# Allegro board ti_foc_motor_8301.brd
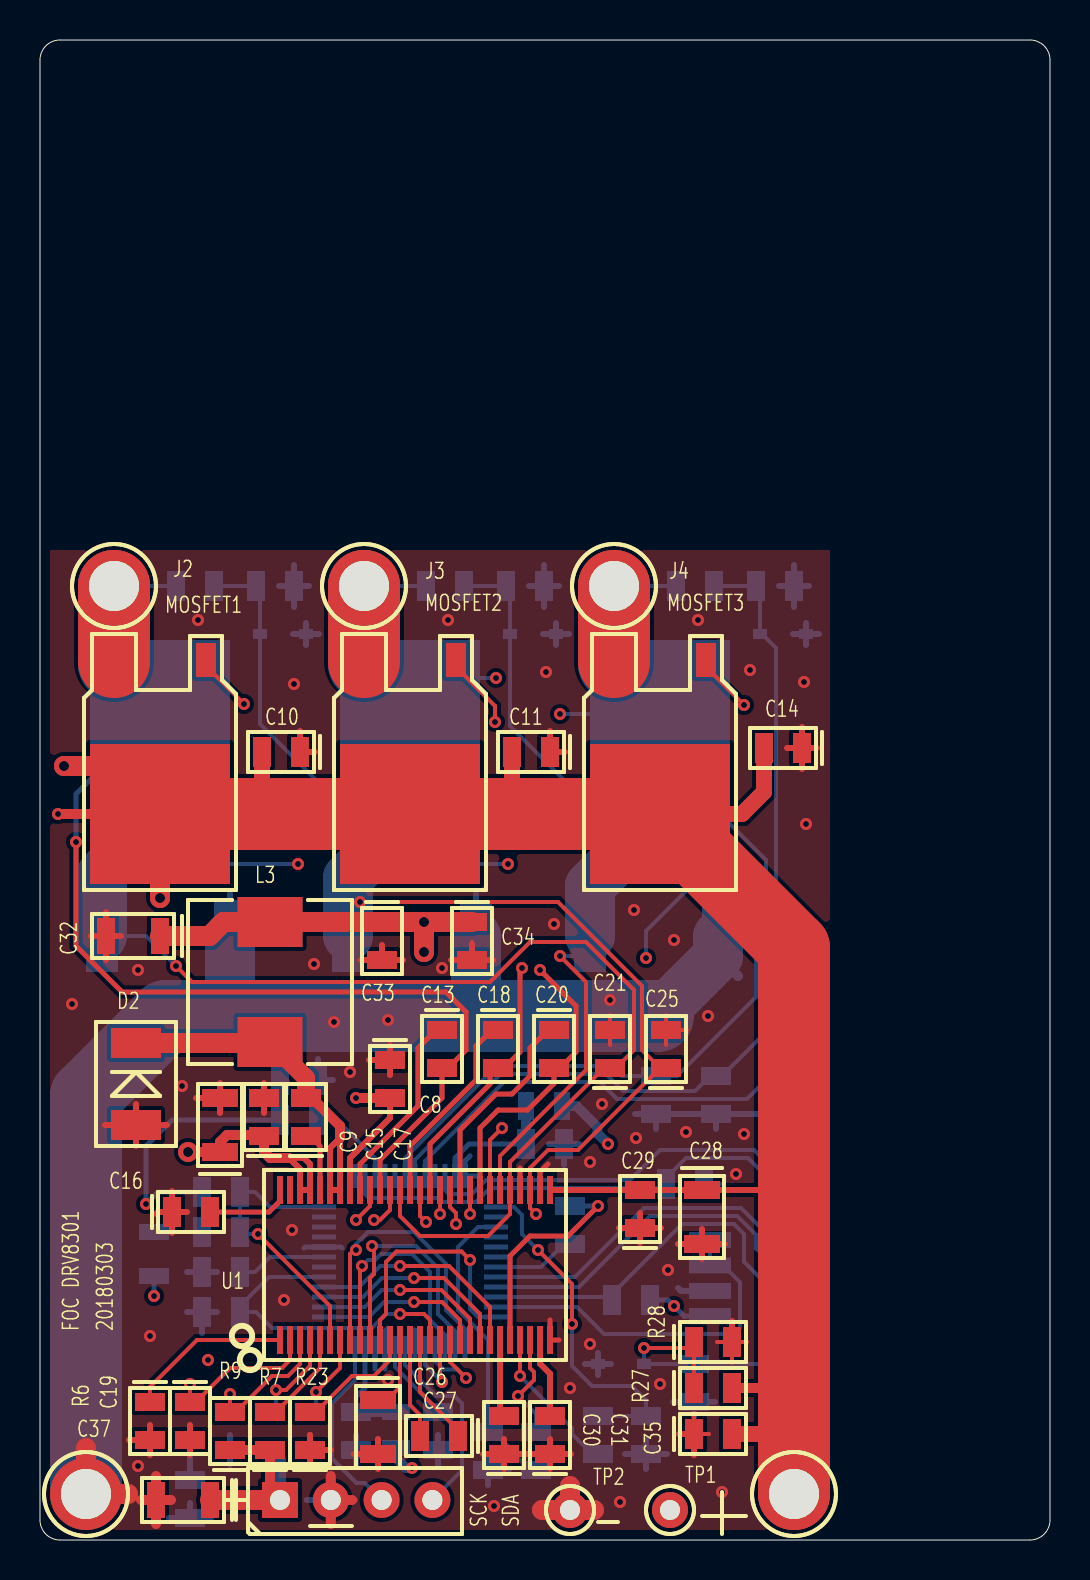
[diagram p0: board, top side]
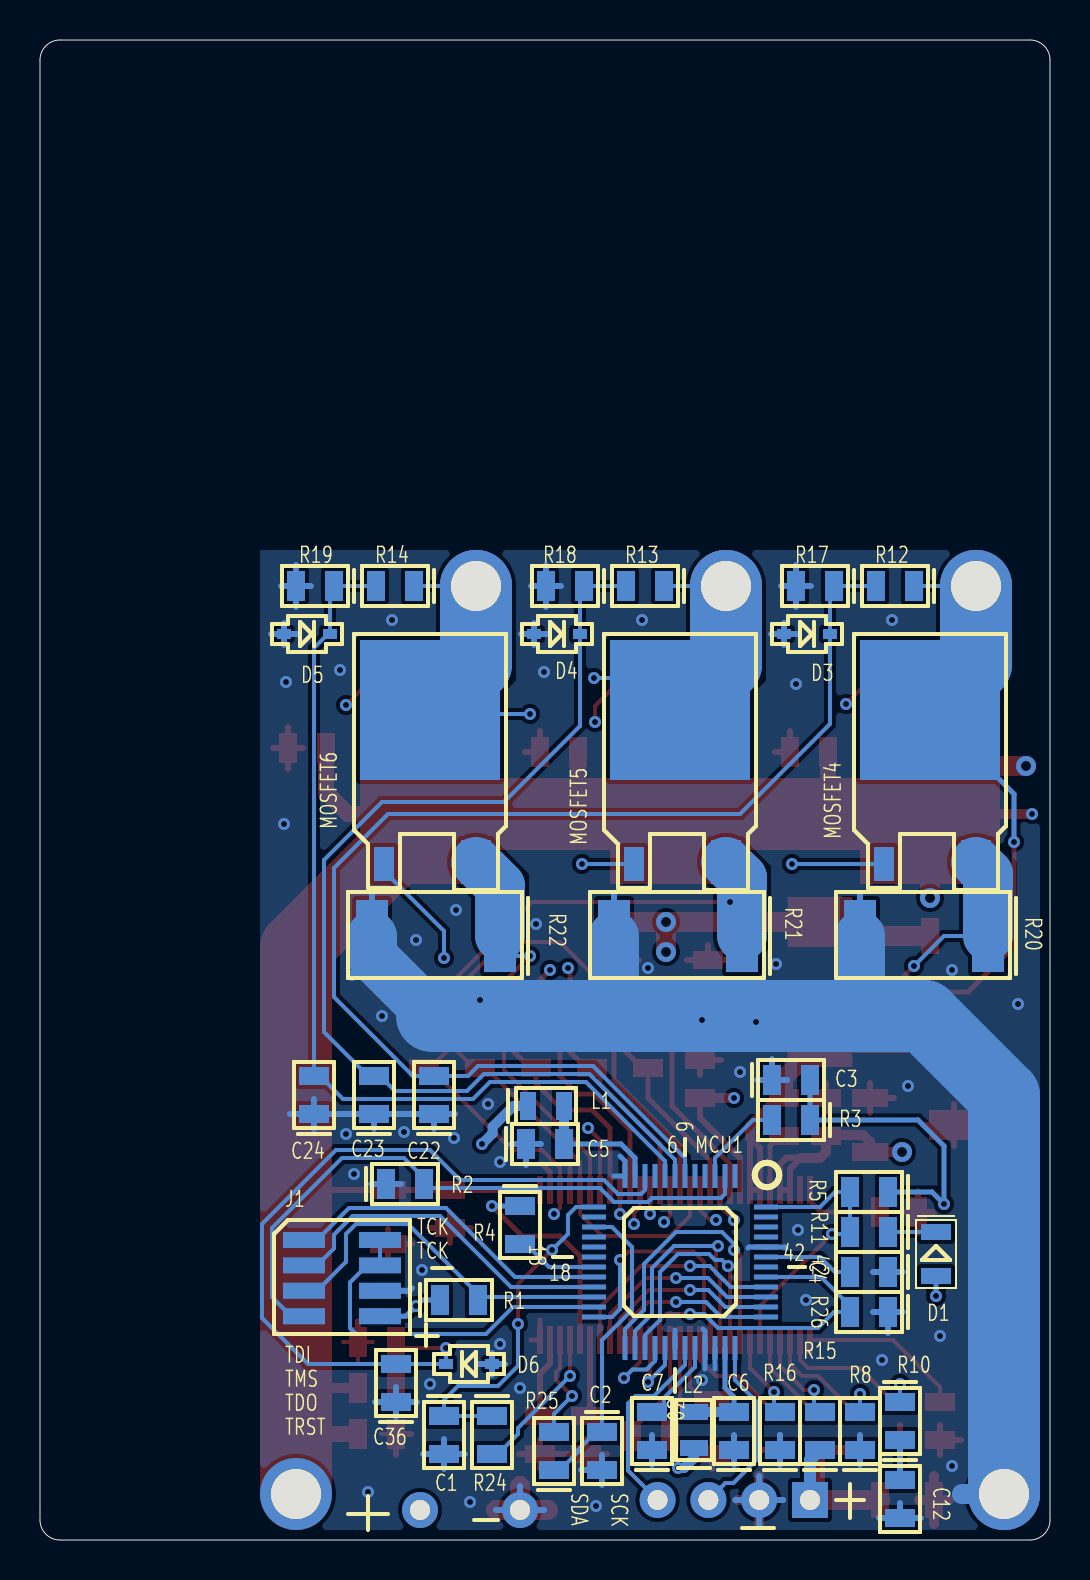
[diagram p1: board, bottom side, seen from below]

Outline 50.5 x 75 mm; copper layers: TOP, POWER, GND, BOTTOM. Coordinates in mm from the lower left corner of the outline.
Outline path: 0,74 0,1 arc(0.29,0.29) 1,0 49.5,0 arc(50.21,0.29) 50.5,1 50.5,74 arc(50.21,74.71) 49.5,75 1,75 arc(0.29,74.71) 0,74

## Design rules (mm)
constraint set DEFAULT: 

## Placement (name value [footprint] x y rotation side)
C1  2.2nF  [SMD_C_0805]  30.3 6.2 180 bottom
C2  2.2nF  [SMD_C_0805]  22.4 5.4 180 bottom
C3  2.2uF  [SMD_C_0805]  13.9 23 90 bottom
C4  2.2uF  [SMD_C_0805]  8.1 13.4 270 bottom
C5  2.2uF  [SMD_C_0805]  26.2 19.8 90 bottom
C6  2.2uF  [SMD_C_0805]  15.8 4.5 0 bottom
C7  2.2uF  [SMD_C_0805]  19.9 4.5 0 bottom
C8  0.1uF  [SMD_C_0805]  17.5 24 0 top
C9  2.2uF  [SMD_C_1206]  9 19.4 180 top
C10  2.2uF  [SMD_C_0805]  13 39.4 270 top
C11  2.2uF  [SMD_C_0805]  25.5 39.4 270 top
C12  6.8nF  [SMD_C_0805]  7.5 3 180 bottom
C13  0.1uF  [SMD_C_0805]  20.1 25.5 0 top
C14  2.2uF  [SMD_C_0805]  38.1 39.6 270 top
C15  0.1uF  [SMD_C_0805]  11.2 20.2 180 top
C16  15nF  [SMD_C_0805]  6.6 16.4 90 top
C17  0.1uF  [SMD_C_0805]  13.3 20.2 180 top
C18  0.1uF  [SMD_C_0805]  22.9 25.5 0 top
C19  120pF  [SMD_C_0805]  7.5 6.9 0 top
C20  0.1uF  [SMD_C_0805]  25.7 25.5 0 top
C21  1nF  [SMD_C_0805]  28.5 23.6 180 top
C22  0.1uF  [SMD_C_0805]  30.8 21.3 0 bottom
C23  0.1uF  [SMD_C_0805]  33.8 21.3 0 bottom
C24  0.1uF  [SMD_C_0805]  36.8 21.3 0 bottom
C25  1nF  [SMD_C_0805]  31.3 23.6 180 top
C26  2.2uF  [SMD_C_1206]  16.9 7 0 top
C27  22nF  [SMD_C_0805]  20.9 5.2 270 top
C28  2.2uF  [SMD_C_1206]  33.1 17.5 0 top
C29  0.1uF  [SMD_C_0805]  30 15.6 180 top
C30  1uF  [SMD_C_0805]  23.2 4.3 180 top
C31  1uF  [SMD_C_0805]  25.5 4.3 180 top
C32  47uF  [SMD_C_1206]  6 30.2 270 top
C33  1uF  [SMD_C_0805]  17.1 30.9 0 top
C34  0.1uF  [SMD_C_0805]  21.6 30.9 0 top
C35  0.1uF  [SMD_C_0805]  32.7 5.3 90 top
C36  0.1uF  [SMD_C_0805]  32.7 6.9 0 bottom
C37  47uF  [SMD_C_1206]  8.5 2 270 top
D1  RED  [SMD_D_0805]  5.7 15.3 180 bottom
D2  CDBB2100-G/100V  [DO-214AA]  4.8 22.8 90 top
D3  3.3V  [SOD323]  11 45.3 270 bottom
D4  3.3V  [SOD323]  23.5 45.3 270 bottom
D5  3.3V  [SOD323]  36 45.3 270 bottom
D6  3.3V  [SOD323]  30.2 8.8 90 bottom
J1  JTAG  [C2X4_SMD_1P27]  37.3 15 180 bottom
J2  motor_A  [BANANA_SMALL]  3.7 47.7 0 top
J3  motor_B  [BANANA_SMALL]  16.2 47.7 0 top
J4  motor_C  [BANANA_SMALL]  28.7 47.7 0 top
J5  power_P  [BANANA_SMALL]  37.7 2.3 0 top
J6  Conn1X4  [CONN1X4]  12 2 90 top
J7  power_GND  [BANANA_SMALL]  2.3 2.3 0 top
L1  bead  [SMD_L_0805]  26.1 21.7 90 bottom
L2  bead  [SMD_L_0805]  17.8 4.6 0 bottom
L3  DR74-330-R/33uH  [SMDR74]  11.5 27.9 90 top
MCU1  TMS320F28027  [LQFP48_MCU]  18.5 13.9 270 bottom
MOSFET1  IRLR7843-TO252AA  [TO252AA_ZK]  6 36.3 180 top
MOSFET2  IRLR7843-TO252AA  [TO252AA_ZK]  18.5 36.3 180 top
MOSFET3  IRLR7843-TO252AA  [TO252AA_ZK]  31 36.3 180 top
MOSFET4  IRLR7843-TO252AA  [TO252AA_ZK]  6 41.5 180 bottom
MOSFET5  IRLR7843-TO252AA  [TO252AA_ZK]  18.5 41.5 180 bottom
MOSFET6  IRLR7843-TO252AA  [TO252AA_ZK]  31 41.5 180 bottom
R1  1K  [SMD_R_0805]  30.5 12 90 bottom
R2  2.2K  [SMD_R_0805]  33.2 17.8 90 bottom
R3  2.2K  [SMD_R_0805]  12 21 270 bottom
R4  1K  [SMD_R_0805]  26.5 16.7 180 bottom
R5  10K  [SMD_R_0805]  8.1 17.4 270 bottom
R6  205K  [SMD_R_0805]  5.5 6.9 0 top
R7  10K  [SMD_R_0805]  11.5 4.5 180 top
R8  10K  [SMD_R_0805]  9.5 4.5 0 bottom
R9  31.6K  [SMD_R_0805]  9.5 4.5 180 top
R10  16.2K  [SMD_R_0805]  7.5 6.9 180 bottom
R11  1K  [SMD_R_0805]  8.1 15.4 270 bottom
R12  62K  [SMD_R_0805]  6.8 47.7 270 bottom
R13  62K  [SMD_R_0805]  19.3 47.7 270 bottom
R14  62K  [SMD_R_0805]  31.8 47.7 270 bottom
R15  10K  [SMD_R_0805]  11.5 4.5 0 bottom
R16  1K  [SMD_R_0805]  13.5 4.5 0 bottom
R17  5K  [SMD_R_0805]  10.8 47.7 270 bottom
R18  5K  [SMD_R_0805]  23.3 47.7 270 bottom
R19  5K  [SMD_R_0805]  35.8 47.7 270 bottom
R20  0.007R  [SMD_R_2512]  3.1 30.2 270 bottom
R21  0.007R  [SMD_R_2512]  15.4 30.2 270 bottom
R22  0.007R  [SMD_R_2512]  27.5 30.2 270 bottom
R23  1K  [SMD_R_0805]  13.5 4.5 180 top
R24  56R  [SMD_R_0805]  27.9 6.2 180 bottom
R25  56R  [SMD_R_0805]  24.8 3.5 0 bottom
R26  1K  [SMD_R_0805]  8.1 11.4 270 bottom
R27  62K  [SMD_R_0805]  32.7 7.6 90 top
R28  5K  [SMD_R_0805]  32.7 9.9 90 top
TP1  CAP_P  [TESTPAD_CIR_10]  31.5 1.5 0 top
TP2  CAP_N  [TESTPAD_CIR_10]  26.5 1.5 0 top
U1  DRV8301  [HTSSOP56]  12 10 90 top

## Library data of the parts
C1-C37 = CAP NP
D1 = LED
D2 = DIODE SCHOTTKY
D3-D6 = DIODE TVS
J1 = C2X4
J2-J5 J7 = Banana
J6 = C1X4Gen
L1 L2 = INDUCTOR
L3 = INDUCTOR IRON
MCU1 = TMS320F28027PT
MOSFET1-MOSFET6 = N_MOSFET_TO252-263
R1-R28 = RESISTOR
TP1 TP2 = TestPad
U1 = DRV8301

## Footprints (pads in the part's own frame, mm; a bottom-side part is the same pattern mirrored in y, then rotated)
BANANA_SMALL
  round 3.6 hole 2.5: 1(0,0)
C2X4_SMD_1P27
  rect 2.1x0.8 smd: 1(0,0) 2(0,-1.27) 3(0,-2.54) 4(0,-3.81) 5(3.8,-3.81) 6(3.8,-2.54) 7(3.8,-1.27) 8(3.8,0)
CONN1X4
  rect 1.8x1.8 hole 1: 1(0,0)
  round 1.8 hole 1: 2(0,-2.54) 3(0,-5.08) 4(0,-7.62)
DO-214AA
  rect 1.5x2.5 smd: 1(-2.05,0) 2(2.05,0)
HTSSOP56
  rect 1.4x0.3 smd: 1(0,0) 2(0,-0.5) 3(0,-1) 4(0,-1.5) 5(0,-2) 6(0,-2.5) 7(0,-3) 8(0,-3.5) 9(0,-4) 10(0,-4.5) 11(0,-5) 12(0,-5.5) 13(0,-6) 14(0,-6.5) 15(0,-7) 16(0,-7.5) 17(0,-8) 18(0,-8.5) 19(0,-9) 20(0,-9.5) 21(0,-10) 22(0,-10.5) 23(0,-11) 24(0,-11.5) 25(0,-12) 26(0,-12.5) 27(0,-13) 28(0,-13.5) 29(7.5,-13.5) 30(7.5,-13) 31(7.5,-12.5) 32(7.5,-12) 33(7.5,-11.5) 34(7.5,-11) 35(7.5,-10.5) 36(7.5,-10) 37(7.5,-9.5) 38(7.5,-9) 39(7.5,-8.5) 40(7.5,-8) 41(7.5,-7.5) 42(7.5,-7) 43(7.5,-6.5) 44(7.5,-6) 45(7.5,-5.5) 46(7.5,-5) 47(7.5,-4.5) 48(7.5,-4) 49(7.5,-3.5) 50(7.5,-3) 51(7.5,-2.5) 52(7.5,-2) 53(7.5,-1.5) 54(7.5,-1) 55(7.5,-0.5) 56(7.5,0)
LQFP48_MCU
  rect 1.2x0.25 smd: 1(-4.3,2.75) 2(-4.3,2.25) 3(-4.3,1.75) 4(-4.3,1.25) 5(-4.3,0.75) 6(-4.3,0.25) 7(-4.3,-0.25) 8(-4.3,-0.75) 9(-4.3,-1.25) 10(-4.3,-1.75) 11(-4.3,-2.25) 12(-4.3,-2.75) 25(4.3,-2.75) 26(4.3,-2.25) 27(4.3,-1.75) 28(4.3,-1.25) 29(4.3,-0.75) 30(4.3,-0.25) 31(4.3,0.25) 32(4.3,0.75) 33(4.3,1.25) 34(4.3,1.75) 35(4.3,2.25) 36(4.3,2.75)
  rect 0.25x1.2 smd: 13(-2.75,-4.3) 14(-2.25,-4.3) 15(-1.75,-4.3) 16(-1.25,-4.3) 17(-0.75,-4.3) 18(-0.25,-4.3) 19(0.25,-4.3) 20(0.75,-4.3) 21(1.25,-4.3) 22(1.75,-4.3) 23(2.25,-4.3) 24(2.75,-4.3) 37(2.75,4.3) 38(2.25,4.3) 39(1.75,4.3) 40(1.25,4.3) 41(0.75,4.3) 42(0.25,4.3) 43(-0.25,4.3) 44(-0.75,4.3) 45(-1.25,4.3) 46(-1.75,4.3) 47(-2.25,4.3) 48(-2.75,4.3)
SMD_C_0805
  rect 1.5x0.9 smd: 1(0,0) 2(0,-1.9)
SMD_C_1206
  rect 1.8x0.9 smd: 1(0,0) 2(0,-2.7)
SMD_D_0805
  rect 1.5x0.8 smd: 1(0,0.1) 2(0,-2.1)
SMD_L_0805
  rect 1.4x0.8 smd: 1(0,0) 2(0,-1.8)
SMD_R_0805
  rect 1.5x0.9 smd: 1(0,0) 2(0,-1.9)
SMD_R_2512
  rect 3.6x1.6 smd: 1(0,0) 2(0,-6.4)
SMDR74
  rect 2.5x3.25 smd: 1(-3,0) 2(3,0)
SOD323
  rect 0.5x0.7 smd: 1(0,0) 2(0,-2.3)
TESTPAD_CIR_10
  round 1.8 hole 1: 1(0,0)
TO252AA_ZK
  rect 1x1.7 smd: 1(-2.3,-7.7)
  rect 1.5x2.2 smd: 3(2.3,-7.6)
  rect 7x7 smd: 4(0,0)

## Nets
3.3V: C3.2 C8.2 C32.1 C33.1 C34.1 C37.1 D1.2 J1.5 J6.1 L1.1 L2.1 L3.2 R1.1 R3.1 R4.1 R5.1 R7.1 R9.1 R15.1 U1.24 U1.49
GND: C1.2 C2.2 C3.1 C4.1 C5.1 C6.1 C7.1 C8.1 C9.2 C10.1 C11.1 C12.2 C14.1 C15.2 C16.1 C19.2 C21.2 C22.1 C23.1 C24.1 C25.2 C26.2 C28.2 C29.1 C30.1 C31.1 C32.2 C33.2 C34.2 C35.1 C36.1 C37.2 D2.1 D3.2 D4.2 D5.2 D6.2 J1.6 J6.2 J7.1 MCU1.12 MCU1.30 MCU1.33 MCU1.34 MCU1.44 R2.1 R6.2 R8.1 R16.1 R17.2 R18.2 R19.2 R20.2 R21.2 R22.2 R23.1 R26.1 R28.2 TP2.1(T) U1.28 U1.30 U1.32
PVDD: C9.1 C10.2 C11.2 C14.2 C15.1 C28.1 C29.2 C35.2 J5.1 MOSFET1.4 MOSFET2.4 MOSFET3.4 R27.2 TP1.1(T) U1.29 U1.53 U1.54
GH_A: MOSFET1.1 U1.47
GH_B: MOSFET2.1 U1.42
GH_C: MOSFET3.1 U1.37
GL_A: MOSFET4.1 U1.45
GL_B: MOSFET5.1 U1.40
GL_C: MOSFET6.1 U1.35
MCU_EN_GATE: MCU1.41 R26.2 U1.16
MCU_IIC_SCK: J6.3 MCU1.36
MCU_IIC_SDA: J6.4 MCU1.31
MCU_INH_A: MCU1.29 U1.17
MCU_INH_B: MCU1.37 U1.19
MCU_INH_C: MCU1.39 U1.21
MCU_INL_A: MCU1.28 U1.18
MCU_INL_B: MCU1.38 U1.20
MCU_INL_C: MCU1.40 U1.22
MCU_ISEN_A: C1.1 MCU1.13 R24.1
MCU_ISEN_B: C2.1 MCU1.15 R25.1
MCU_NFAULT: MCU1.48 R5.2 R11.2 U1.6
MCU_SPI_CS: MCU1.25 U1.8
MCU_SPI_MISO: MCU1.26 U1.10
MCU_SPI_MOSI: MCU1.27 U1.9
MCU_SPI_SCK: MCU1.24 U1.11
MCU_VSEN_A: C22.2 D3.1(CATHODE) MCU1.6 R12.2 R17.1
MCU_VSEN_B: C23.2 D4.1(CATHODE) MCU1.7 R13.2 R18.1
MCU_VSEN_C: C24.2 D5.1(CATHODE) MCU1.8 R14.2 R19.1
MCU_VSEN_PVDD: C36.2 D6.1(CATHODE) MCU1.10 R27.1 R28.1
PH_3.3V: C17.2 D2.2(CATHODE) L3.1 U1.50 U1.51
SH_A: C13.2 J2.1 MOSFET1.3(S) MOSFET4.4 R12.1 U1.46
SH_B: C18.2 J3.1 MOSFET2.3(S) MOSFET5.4 R13.1 U1.41
SH_C: C20.2 J4.1 MOSFET3.3(S) MOSFET6.4 R14.1 U1.36
SL_A: C21.1 MOSFET4.3(S) R20.1 U1.33 U1.44
SL_B: C25.1 MOSFET5.3(S) R21.1 U1.31 U1.39
SL_C: MOSFET6.3(S) R22.1 U1.34
TCK: J1.7 J1.8 MCU1.23
TDI: J1.1 MCU1.20
TDO: J1.3 MCU1.22 R1.2
TMS: J1.2 MCU1.21
TRST: J1.4 MCU1.2 R2.2
N3758007: C5.2 L1.2 MCU1.11
N3759669: C6.2 L2.2 MCU1.35
N3759821: C4.2 MCU1.43
N3759959: C7.2 MCU1.32
N3797926: C13.1 U1.48
N3798894: C18.1 U1.43
N3798924: C20.1 U1.38
N3799513: C30.2 U1.23
N3800016: C31.2 U1.27
N3804381: R23.2 U1.12
N3804816: C26.1 U1.13
N3804846: C27.2 U1.14
N3804850: C27.1 U1.15
N3806139: C17.1 U1.52
N3808302: C16.2 U1.56
N3808746: D1.1(CATHODE) R11.1
N3808982: R15.2 U1.4
N3809060: C19.1 R10.1 U1.2
N3810275: C12.1 R10.2
N3811170: R6.1 U1.1
N3811838: R8.2 R9.2 U1.3(VSENSE)
N3812319: R7.2 U1.5
N3812682: R16.2 U1.7
N3820369: MCU1.3(X\R\S\) R3.2
N3822203: MCU1.19 R4.2
N379506724: R24.2 U1.25
N379506725: R25.2 U1.26

Pads without a net: MCU1 1 4 5 9 14 16 17 18 42 45 46 47; U1 55

## Via types
v1: diameter 0.6, hole 0.3, TOP to BOTTOM, 91 vias
v2: diameter 1, hole 0.5, TOP to BOTTOM, 5 vias

## Routing (per net, layer and track width the routed paths; a pad name or vN(x,y) marks a point on that pad's centre or on a via; arc(x,y) is an arc through that point)
3.3V: length 75.6
  TOP w0.25: U1.24 23.5,14.2 24.5,15.2 26.4,15.2 v1(27.9,16.7)
  TOP w0.3: U1.49 15.5,19.1 17.5,21.1 C8.2
  TOP w0.5: R9.1 R7.1 11.5,2.5 J6.1 ; C8.2 v1(15.8,22.1)
  TOP w1: v2(19.2,30.9) C33.1 L3.2 9.18,30.9 8.47,30.2 C32.1 ; v2(19.2,30.9) v2(19.2,29.4) ; v2(19.2,30.9) C34.1 ; C37.1 J6.1
  POWER w0.2: 12,0.8 12,0.9
  POWER w0.3: 10.8,2 J6.1 13.2,2
  POWER w0.5: 12,0.9 J6.1 12,3.2
  BOTTOM w0.25: R5.1 5.9,17.4 v1(5.3,16.8) 5.3,19.7 6.6,21 R3.1 C3.2 ; D1.2 v1(5.7,12.2) ; J1.5 32.21,11.19 v1(31.7,11.7) 31.4,12 R1.1 ; R4.1 v1(27.9,16.7)
  BOTTOM w0.5: v1(18.6,3.6) 18.3,3.6 17.8,4.1 L2.1 ; L1.1 26.82,21.7 27.87,20.66 27.87,20.33 v1(28.4,19.8)
  BOTTOM w0.6: R7.1 12,4 J6.1
GND: length 259
  TOP w0.2: 34.6,8.85 R28.2 ; R28.2 33.85,9.9 ; R28.2 35.35,9.9 ; 31.3,24.75 C25.2 ; C25.2 32.35,25.5 ; C25.2 31.3,26.25 ; 28.5,26.25 C21.2 28.5,24.75 ; 33.45,5.3 C35.1 32.7,6.35 ; 15.74,2 15.6,2 ; 21.6,29.9 21.6,29.8 ; 34.3,14.8 34.2,14.8
  TOP w0.25: 24,18.6 U1.32 ; 25.95,10 U1.28 25.5,11 ; 25.4,18.8 25,18.4 U1.30
  TOP w0.3: C29.1 28.95,15.6 ; C29.1 30,16.35 ; C29.1 30,14.85 ; C29.1 31.05,15.6 ; C16.1 6.6,15.35 ; C16.1 6.6,17.45 ; C16.1 5.9,16.4 5.8,16.3 ; C16.1 7.35,16.4 ; R6.2 5.5,5.75 ; R6.2 4.45,5 ; R6.2 5.5,4.25 ; C32.2 2.55,30.2 ; C32.2 4.05,30.2 ; C32.2 3.3,31.4 ; C32.2 3.3,29 ; 31.95,5.3 C35.1 32.7,4.25 ; 34.2,14.8 C28.2 ; C28.2 33.1,14.05 ; C28.2 33.1,15.55 ; C28.2 31.9,14.8 ; C31.1 26.55,4.3 ; C31.1 C30.1 ; C31.1 25.5,5.05 ; C31.1 25.5,3.55 ; C26.2 16.9,5.05 ; C26.2 15.7,4.3 ; C26.2 16.9,3.55 ; D2.1 3.25,20.75 ; D2.1 6.35,20.75 ; D2.1 4.8,19.7 ; D2.1 4.8,21.8 ; C30.1 22.15,4.3 ; C30.1 23.2,5.05 ; C30.1 23.2,3.55 ; C14.1 38.1,38.55 ; C14.1 38.85,39.6 ; C14.1 37.35,39.6 ; C14.1 38.1,40.65 ; C9.2 9,22.85 ; C9.2 7.8,22.1 ; C9.2 9,21.35 ; C34.2 22.65,29 ; C34.2 20.55,29 ; C34.2 21.6,29.8 ; R23.1 13.5,3.75 ; R23.1 13.5,5.25 ; R23.1 14.55,4.5 ; 13,40.45 C10.1 13.75,39.4 ; 7.5,4.25 C19.2 7.5,5.75 ; C33.2 16.05,29 ; C33.2 17.1,29.75 ; C33.2 18.15,29 ; C8.1 17.5,23.25 ; C8.1 16.45,24 ; C8.1 17.5,24.75 ; 11.2,21.35 C15.2 11.2,22.85 ; 26.25,39.4 C11.1 25.5,40.45 ; R28.2 34.6,10.95
  TOP w0.5: C37.2 5.8,3.2 ; C37.2 5.8,0.8 ; C37.2 5.05,2 ; C37.2 6.55,2 ; J6.2 14.54,0.8 ; J6.2 15.6,2 ; J6.2 14.54,3.2
  TOP w1: 4.4,2.3 J7.1 2.3,4.6 ; TP2.1 26.5,2.7 ; TP2.1 27.7,1.5 ; TP2.1 25.1,1.5
  GND w0.3: 13.34,2 J6.2 15.74,2
  GND w0.5: 25.1,1.5 TP2.1 ; TP2.1 27.7,1.5 ; TP2.1 26.5,2.7 ; 14.54,0.8 J6.2 14.54,3.2
  GND w1: 4.4,2.3 J7.1 2.3,4.4
  BOTTOM w0.2: 20.7,30.2 R21.2 22.9,30.2 ; 10.6,30.2 R20.2 8.4,30.2 ; 35,30.2 R22.2 32.8,30.2
  BOTTOM w0.25: 17.25,8.55 MCU1.33 17.25,10.45 17.35,10.55 ; 21.8,18.2 MCU1.12 21.25,18.95 21.5,19.2 ; 16.75,8.55 MCU1.34 ; 15.1,14.6 15.05,14.65 MCU1.44 13.25,14.65 13.2,14.6 ; MCU1.30 18.75,10.5
  BOTTOM w0.3: R20.2 9.5,32.3 ; C36.1 31.65,6.9 ; C36.1 32.7,6.15 ; C36.1 32.7,7.65 ; C36.1 33.75,6.9 ; J6.2 14.54,0.8 ; J6.2 15.74,2 ; J6.2 14.54,3.2 ; J6.2 13.34,2 ; 38,21.3 C24.1 ; C24.1 36.8,22.05 ; C24.1 36.8,20.55 ; C24.1 C23.1 ; C1.2 30.3,3.55 ; C1.2 31.35,4.3 ; C1.2 30.3,5.05 ; C1.2 29.25,4.3 ; TP2.1 25.3,1.5 ; TP2.1 27.7,1.5 ; TP2.1 26.5,2.7 ; R18.2 25.95,47.7 ; R18.2 25.2,48.75 ; R18.2 24.45,47.7 ; R18.2 25.2,46.65 ; 13.5,3.75 R23.1 13.5,5.25 ; D4.2 26.45,45.3 ; D4.2 25.8,45.85 ; D4.2 25.15,45.3 ; D4.2 25.8,44.75 ; R17.2 12.7,48.75 ; R17.2 11.95,47.7 ; R17.2 12.7,46.65 ; R17.2 13.45,47.7 ; D5.2 38.3,44.75 ; D5.2 37.65,45.3 ; D5.2 38.3,45.85 ; D5.2 38.95,45.3 ; C23.1 C22.1 ; C23.1 33.8,20.55 ; C22.1 29.75,21.3 ; C22.1 30.8,20.55 ; C5.1 26.95,19.8 ; C5.1 26.2,18.75 ; C5.1 25.45,19.8 ; R19.2 37.7,46.65 ; R19.2 38.45,47.7 ; R19.2 36.95,47.7 ; R19.2 37.7,48.75 ; 9.5,3.75 R8.1 9.5,5.25 ; D3.2 13.3,45.85 ; D3.2 12.65,45.3 ; D3.2 13.95,45.3 ; D3.2 13.3,44.75 ; 19.9,5.25 C7.1 19.9,3.75 ; 7.35,13.4 C4.1 8.85,13.4 ; C12.2 6.45,1.1 ; C12.2 8.55,1.1 ; C12.2 7.5,1.85 ; C2.2 22.4,2.75 ; C2.2 23.45,3.5 ; C2.2 22.4,4.25 ; J1.6 32.04,12.46 31.9,12.6 ; D6.2 27.25,8.8 ; D6.2 27.9,8.25 ; D6.2 27.9,9.35 ; D6.2 28.55,8.8 ; R26.1 7.35,11.4 ; R26.1 8.85,11.4 ; R26.1 8.1,10.35 ; R22.2 33.9,32.3 ; C3.1 13.15,23 ; C3.1 14.65,23 ; C3.1 13.9,24.05 ; 15.8,3.75 C6.1 15.8,5.25 ; R21.2 21.8,32.3 ; 32.45,17.8 R2.1 33.95,17.8
  BOTTOM w0.5: 33.9,29.2 34.9,28.2
  BOTTOM w1: J7.1 4.4,2.3
  BOTTOM w2.5: R22.2 33.9,29.2 30.9,26.2 ; 9.5,26.2 R20.2 ; 21.8,26.2 R21.2
  BOTTOM w3.6: 30.9,26.2 6.3,26.2 2.3,22.2 J7.1
  vias: v1(1.6,26.8) v1(4.9,28.5) v1(4.9,3.7) v1(5.5,10.2) v1(7.1,22.7) v1(7.9,46) v1(8.4,9) v1(12.2,12) v1(12.6,15.5) v1(12.7,42.8) v1(13.7,28.8) v1(14.7,25.9) v1(15.5,23.4) v1(17.4,26) v1(17.4,8) v1(20.1,28.6) v1(20.4,46) v1(22.7,1.7) v1(25.3,43.4) v1(25.7,30.8) v1(26.5,7.6) v1(27.5,18.9) v1(27.5,9.8) v1(28.1,21.8) v1(28.5,27) v1(29,1.9) v1(29.7,31.5) v1(29.8,20.1) v1(31,7.8) v1(31.4,13.5) v1(31.7,30) v1(32.3,20.4) v1(32.9,46) v1(33.4,26.2) v1(34.1,2.4) v1(34.8,18.3) v1(35.2,20.3) v1(35.5,43.5) v1(38.2,42.9) v1(38.3,35.8)
PVDD: length 130.5
  TOP w0.3: 37.7,17.5 C28.1 C29.2 U1.29 ; 13.5,18.8 13.19,19.11 12.46,19.11 12.45,19.1 13,18.55 U1.54 U1.53 13.5,18.8
  TOP w0.5: MOSFET1.4 v1(0.9,36.3) ; R27.2 37.7,7.6 ; 12.45,19.1 11.5,19.1 11.2,19.4 C15.1 11.15,20.25 9.35,20.25 9,19.9 C9.1 v2(7.4,19.4)
  TOP w0.8: 22.6,36.3 23.6,37.3 C11.2 ; MOSFET3.4 35.1,36.3 36.2,37.4 C14.2 ; C10.2 11.1,37.3 10.1,36.3 ; C35.2 37.7,5.3
  TOP w1: v2(1.2,38.7) 5,38.7 6,37.7 MOSFET1.4 v2(6,32.1)
  TOP w3.6: J5.1 37.7,29.6 MOSFET3.4 MOSFET2.4 MOSFET1.4
  POWER w0.5: 30.3,1.5 TP1.1 31.5,2.7
  POWER w1: 35.6,2.3 J5.1 37.7,4.6 ; TP1.1 32.8,1.5
GH_A: length 32.9
  TOP w0.2: MOSFET1.1 8.3,43.7 v1(10.2,41.8) ; U1.47 16.5,16.7 v1(15.8,16)
  POWER w0.2: v1(10.2,41.8) 11.7,40.3 11.7,21.2 15.8,17.1 v1(15.8,16)
GH_B: length 32.1
  TOP w0.2: v1(19.3,15.9) 19,16.2 U1.42 ; v1(22.75,40.9) 22.75,41.7 20.8,43.65 MOSFET2.1
  POWER w0.2: v1(19.3,15.9) 19.3,20.7 22.75,24.15 v1(22.75,40.9)
GH_C: length 35.4
  TOP w0.2: v1(21.5,16.3) U1.37 ; MOSFET3.1 33.3,43.65 v1(35.2,41.75)
  POWER w0.2: v1(35.2,41.75) 35.2,30 v1(21.5,16.3)
GL_A: length 26
  TOP w0.2: v1(16.7,16) 17,16 17.5,16.5 U1.45
  POWER w0.2: v1(12.9,33.8) 12.9,20.8 16.7,17 v1(16.7,16)
  BOTTOM w0.2: v1(12.9,33.8) MOSFET4.1
GL_B: length 22.7
  TOP w0.2: v1(20,16.3) U1.40
  POWER w0.2: v1(20,16.3) 20,20.7 23.4,24.1 v1(23.4,33.8)
  BOTTOM w0.2: MOSFET5.1 v1(23.4,33.8)
GL_C: length 21.5
  TOP w0.2: v1(23.1,20.6) 22.5,20 U1.35
  POWER w0.2: v1(23.1,20.6) 23.1,23.1 29.1,29.1 v1(30.3,29.1)
  BOTTOM w0.2: v1(30.3,29.1) 30.3,30.45 33.3,33.45 MOSFET6.1
MCU_EN_GATE: length 16.3
  TOP w0.2: U1.16 19.5,11 19.2,11.3 v1(18,11.3)
  BOTTOM w0.2: MCU1.41 11.45,13.15 10,11.7 R26.2 10.8,11.4 11.6,10.6 16.6,10.6 17.3,11.3 v1(18,11.3)
MCU_IIC_SCK: length 9.3
  BOTTOM w0.2: J6.3 16.23,2.85 15.83,2.85 14.6,4.08 14.6,6.85 15.75,8 MCU1.36
MCU_IIC_SDA: length 9.9
  BOTTOM w0.2: J6.4 21.1,3.48 21.1,6.82 20.72,7.2 19.8,7.2 18.25,8.75 MCU1.31
MCU_INH_A: length 4.2
  TOP w0.2: U1.17 20,8 v1(20.1,7.9)
  BOTTOM w0.2: MCU1.29 19.25,8.75 v1(20.1,7.9)
MCU_INH_B: length 8.5
  TOP w0.2: U1.19 21,11 20.1,11.9 v1(18.7,11.9)
  BOTTOM w0.2: MCU1.37 16.45,11.15 17.2,11.9 v1(18.7,11.9)
MCU_INH_C: length 10.2
  TOP w0.2: v1(18.7,13.1) 20.2,13.1 22,11.3 U1.21
  BOTTOM w0.2: MCU1.39 16.15,12.15 17.1,13.1 v1(18.7,13.1)
MCU_INL_A: length 4.8
  TOP w0.2: U1.18 20.5,8.9 v1(21.3,8.1)
  BOTTOM w0.2: v1(21.3,8.1) 20.88,8.52 20.18,8.52 19.75,8.95 MCU1.28
MCU_INL_B: length 9.3
  TOP w0.2: U1.20 21.5,11.07 20.07,12.5 v1(18,12.5)
  BOTTOM w0.2: v1(18,12.5) 17.08,12.5 16.23,11.65 MCU1.38
MCU_INL_C: length 11.2
  TOP w0.2: U1.22 22.5,11.65 20.45,13.7 v1(18,13.7)
  BOTTOM w0.2: MCU1.40 15.96,12.65 17.01,13.7 v1(18,13.7)
MCU_ISEN_A: length 17.7
  TOP w0.2: v1(26.6,10.8) 26.6,12.8 v1(24.9,14.5)
  BOTTOM w0.2: R24.1 C1.1 30.3,7 29.6,7.7 27.6,7.7 26.6,8.7 v1(26.6,10.8) ; MCU1.13 23.7,16.65 24.1,16.25 24.1,15.3 v1(24.9,14.5)
MCU_ISEN_B: length 15.4
  BOTTOM w0.2: MCU1.15 21.9,15.65 20.9,14.65 20.9,11.5 22.4,10 C2.1 22.7,5.4 23.6,4.5 23.6,4.4 24.5,3.5 R25.1
MCU_NFAULT: length 14.2
  TOP w0.2: v1(10.9,15.3) 14.5,11.7 U1.6
  BOTTOM w0.2: v1(10.9,15.3) 10.1,15.3 R11.2 R5.2 10.75,17.4 11.5,16.65 MCU1.48
MCU_SPI_CS: length 15
  TOP w0.2: v1(15.8,14.5) 15.7,14.5 15.5,14.3 U1.8
  BOTTOM w0.2: MCU1.25 21.25,10.55 20.3,11.5 20.3,13.8 18.7,15.4 16.4,15.4 15.8,14.8 v1(15.8,14.5)
MCU_SPI_MISO: length 12.9
  TOP w0.2: v1(16.6,14.7) 16.7,14.6 16.7,13.3 16.5,13.1 U1.10
  BOTTOM w0.2: MCU1.26 20.75,10.45 19.9,11.3 19.9,13.6 18.8,14.7 v1(16.6,14.7)
MCU_SPI_MOSI: length 11.9
  TOP w0.2: v1(16.1,13.7) 16,13.6 U1.9
  BOTTOM w0.2: MCU1.27 20.25,10.25 19.5,11 19.5,13.4 18.6,14.3 17.05,14.3 16.75,14 16.4,14 v1(16.1,13.7)
MCU_SPI_SCK: length 12.5
  TOP w0.2: v1(21.5,14) 21.08,14.42 17.82,14.42 17.3,13.9 17.3,11.3 17,11 U1.11
  BOTTOM w0.2: v1(21.5,14) 21.5,11.55 21.9,11.15 MCU1.24
MCU_VSEN_A: length 65.5
  BOTTOM w0.2: MCU1.6 18.25,19.1 22.85,23.7 28.6,23.7 29.1,23.2 C22.2 31.85,23.2 35.8,27.15 35.8,33.6 33.1,36.3 15.5,36.3 11,40.8 D3.1 11,47.5 R17.1 R12.2
MCU_VSEN_B: length 55.1
  BOTTOM w0.2: MCU1.7 18.75,19.02 23.03,23.3 28.3,23.3 29.15,22.45 32.75,22.45 33.5,23.2 C23.2 34.1,23.2 36.3,25.4 36.3,34 33.4,36.9 27.3,36.9 23.5,40.7 D4.1 23.5,47.5 R18.1 R13.2
MCU_VSEN_C: length 47.8
  BOTTOM w0.2: R14.2 R19.1 36,47.5 D5.1 36.1,45.3 36.8,44.6 C24.2 36.5,23.2 35.35,22.05 28.85,22.05 28,22.9 23.2,22.9 19.25,18.95 MCU1.8
MCU_VSEN_PVDD: length 43
  TOP w0.2: v1(30.2,9.6) 32.4,9.6 R28.1 R27.1
  BOTTOM w0.2: v1(30.2,9.6) D6.1 C36.2 37.1,8.8 39.4,11.1 39.4,15.8 35.7,19.5 31,19.5 29.5,18 22.3,18 21.6,17.3 20.45,17.3 20.25,17.5 MCU1.10
PH_3.3V: length 19.1
  TOP w0.3: U1.50 U1.51 14.5,19.6 15,20.1 U1.50
  TOP w0.5: C17.2 13.6,22.1 15,20.7 15,20.1
  TOP w0.9: C17.2 13.3,23.1 L3.1
  TOP w1: L3.1 10.5,24.9 10.45,24.85 D2.2
SH_A: length 59.3
  TOP w0.25: v1(1.8,34.9) 1.8,29.7 4.1,27.4 20.3,27.4 21.3,26.4 21.3,24.5 20.4,23.6 C13.2 20.1,22.1 17,19 U1.46
  TOP w3.6: MOSFET1.3 J2.1
  BOTTOM w0.2: R12.1 J2.1
  BOTTOM w0.25: v1(1.8,34.9) 1.8,37.3 MOSFET4.4
  BOTTOM w3.6: J2.1 3.7,43.8 MOSFET4.4
SH_B: length 47.2
  TOP w0.25: v1(24.1,28.6) 24,28.5 24,24.4 23.2,23.6 C18.2 22.5,23.2 22.5,22.8 19.5,19.8 U1.41
  TOP w3.6: MOSFET2.3 J3.1
  POWER w0.25: v1(22.8,43.1) 24.1,41.8 v1(24.1,28.6)
  BOTTOM w0.2: MOSFET5.4 20.1,43.1 v1(22.8,43.1) ; J3.1 R13.1
  BOTTOM w3.6: MOSFET5.4 16.2,43.8 J3.1
SH_C: length 47.1
  TOP w0.25: U1.36 22,20.6 22.9,21.5 24.38,21.5 25.7,22.82 C20.2 26,23.6 26.8,24.4 26.8,26.7 v1(25,28.5)
  TOP w3.6: MOSFET3.3 J4.1
  POWER w0.25: v1(25,28.5) 25,40.3 v1(26,41.3)
  BOTTOM w0.2: MOSFET6.4 30.8,41.3 v1(26,41.3) ; J4.1 R14.1
  BOTTOM w3.6: J4.1 28.7,43.8 MOSFET6.4
SL_A: length 55.1
  TOP w0.2: v1(6.8,28.7) 7.6,27.9 22.5,27.9 24.5,29.9 27.3,29.9 29.7,27.5 29.7,24.5 28.8,23.6 C21.1 28.2,23.6 23.5,18.9 U1.33 23.5,16.3 22.4,15.2 19,15.2 18,16.2 U1.44
  BOTTOM w0.2: v1(6.8,28.7) 5.3,30.2 R20.1
  BOTTOM w2.5: R20.1 3.1,33.3 MOSFET4.3
SL_B: length 42.3
  TOP w0.2: v1(20.8,15.8) 20.8,16.35 20.5,16.65 U1.39 ; v1(16,31.9) 25.9,31.9 30.1,27.7 30.1,24.5 31,23.6 C25.1 31.1,23.4 30.8,23.4 26.9,19.5 25.4,19.5 24.5,18.6 U1.31 24.5,16.6 v1(24.8,16.3)
  POWER w0.2: v1(24.8,16.3) 24.5,16.3 23.58,15.38 21.22,15.38 v1(20.8,15.8)
  BOTTOM w2.5: MOSFET5.3 15.4,33.1 R21.1
SL_C: length 20.6
  TOP w0.2: v1(26,29.2) 27.3,27.9 27.3,23.5 23,19.2 U1.34
  BOTTOM w0.2: R22.1 27.5,29.4 27.3,29.2 v1(26,29.2)
  BOTTOM w2.5: MOSFET6.3 27.5,32.7 R22.1
TCK: length 18.3
  BOTTOM w0.2: J1.8 J1.7 34.15,13.73 35,12.88 35,10.6 34.7,10.3 28.2,10.3 26.85,11.65 MCU1.23
TDI: length 16.6
  BOTTOM w0.2: MCU1.20 26.75,13.15 30.2,16.6 35.05,16.6 36.65,15 J1.1
TDO: length 18.5
  BOTTOM w0.2: MCU1.22 28.45,12.15 R1.2 28.6,12.3 32.1,15.8 34.7,15.8 35.2,15.3 35.2,13.91 36.65,12.46 J1.3
TMS: length 17.4
  BOTTOM w0.2: J1.2 36.65,13.73 35.8,14.58 35.8,15.27 34.87,16.2 30.5,16.2 26.95,12.65 MCU1.21
TRST: length 31.7
  BOTTOM w0.2: MCU1.2 16.25,17.3 16.45,17.1 19.9,17.1 20.1,16.9 21.8,16.9 22.5,17.6 31.1,17.6 R2.2 31.3,18.1 32.3,19.1 35.4,19.1 38.9,15.6 38.9,12.14 37.95,11.19 J1.4
N3758007: length 6.6
  BOTTOM w0.25: C5.2 21.45,19.8 20.75,19.1 MCU1.11
  BOTTOM w0.5: C5.2 L1.2
N3759669: length 5.4
  BOTTOM w0.25: C6.2 15.8,7.15 16.25,7.6 MCU1.35
  BOTTOM w0.5: L2.2 C6.2
N3759821: length 4.5
  BOTTOM w0.2: MCU1.43 11.5,14.15 10.75,13.4 C4.2
N3759959: length 4.3
  BOTTOM w0.2: MCU1.32 17.75,8.65 19.3,7.1 19.3,6.7 19.6,6.4 C7.2
N3797926: length 9.9
  TOP w0.25: C13.1 19.8,25.5 18.9,24.6 18.9,21.7 16,18.8 U1.48
N3798894: length 10
  TOP w0.25: U1.43 18.5,19.7 21.8,23 21.8,24.7 21.82,24.72 22.6,25.5 C18.1
N3798924: length 10.6
  TOP w0.25: C20.1 25.4,25.5 24.5,24.6 24.5,23.2 23.6,22.3 22.8,22.3 21,20.5 U1.38
N3799513: length 3.9
  TOP w0.3: C30.2 23,6.4 U1.23
N3800016: length 4
  TOP w0.3: U1.27 25,8.81 25.5,8.31 C31.2
N3804381: length 6.1
  TOP w0.2: U1.12 17.5,9 16.7,8.2 15.6,8.2 13.8,6.4 R23.2
N3804816: length 3.7
  TOP w0.2: U1.13 18,7.65 17.35,7 C26.1
N3804846: length 5
  TOP w0.2: C27.2 19,6.25 18.5,6.75 U1.14
N3804850: length 5.6
  TOP w0.2: U1.15 19,7.4 20.9,5.5 C27.1
N3806139: length 3.1
  TOP w0.25: U1.52 14,19.7 13.5,20.2 C17.1
N3808302: length 4.3
  TOP w0.25: U1.56 12,16.95 11.45,16.4 C16.2
N3808746: length 2.4
  BOTTOM w0.2: D1.1 R11.1
N3808982: length 4.7
  TOP w0.2: U1.4 13.5,8.7 12.3,7.5 v1(11.8,7.5)
  BOTTOM w0.2: v1(11.8,7.5) 11.8,6.7 R15.2
N3809060: length 8.7
  TOP w0.2: v1(7.5,7.8) C19.1 7.8,6.9 9.5,8.6 12.1,8.6 12.5,9 U1.2
  BOTTOM w0.2: C19.1 v1(7.5,7.8)
N3810275: length 2
  BOTTOM w0.3: R10.2 C12.1
N3811170: length 8.2
  TOP w0.2: U1.1 7.85,10 5.5,7.65 R6.1
N3811838: length 7.5
  TOP w0.2: U1.3 13,8.8 12.4,8.2 11.6,8.2 9.8,6.4 R9.2 v1(9.5,7.3)
  BOTTOM w0.2: v1(9.5,7.3) R9.2
N3812319: length 4.8
  TOP w0.2: U1.5 14,8.6 11.8,6.4 R7.2
N3812682: length 4.3
  TOP w0.2: v1(13.8,7.4) 15,8.6 U1.7
  BOTTOM w0.2: v1(13.8,7.4) 13.8,6.65 13.55,6.4 R16.2
N3820369: length 4.5
  BOTTOM w0.2: MCU1.3 16.75,19.1 14.85,21 R3.2
N3822203: length 4.2
  BOTTOM w0.2: MCU1.19 25.05,13.65 26.2,14.8 R4.2
N379506724: length 7.5
  TOP w0.2: v1(24,8.2) U1.25
  BOTTOM w0.2: R24.2 27.6,4.3 26.6,5.3 26.6,5.6 v1(24,8.2)
N379506725: length 5.4
  TOP w0.2: U1.26 24.5,8.6 24.7,8.4 24.7,8 v1(23.9,7.2)
  BOTTOM w0.2: R25.2 24.8,6.3 v1(23.9,7.2)

## Copper pours and planes (outline as drawn; the poured copper is in the pictures)
3.3V on POWER: 0.5,0.5 0.5,32.9 34.8,32.9 34.8,0.5 ; 4 cut-outs
GND on TOP: 0.5,0.5 0.5,49.5 39.5,49.5 39.5,0.5 ; 21 cut-outs
GND on BOTTOM: 0.5,0.5 0.5,49.5 39.5,49.5 39.5,0.5 ; 13 cut-outs
GND on GND: 0.5,0.5 0.5,49.5 39.5,49.5 39.5,0.5
PVDD on POWER: 3,18.2 0.5,20.7 0.5,37.2 0.5,48.8 1.1,49.4 39,49.4 39.4,49 39.4,0.8 39.2,0.6 30.1,0.6 29.8,0.9 29.8,2.2 30.9,3.3 33.6,3.3 35,4.7 35,32.8 34.7,33.1 8.4,33.1 6.5,31.2 5.6,31.2 5,30.6 5,24.4 10.2,19.2 10.2,18.7 9.7,18.2

## Text on the board
Ref Des/Silkscreen Bottom: TCK | TDI | TMS | TDO | TRST | SCK | SDA
Ref Des/Silkscreen Top: FOC DRV8301 | 20180303 | SCK | SDA
NCLEGEND-1-4: FIGURE | FINISHED_SIZE | 0.3 | 0.5 | 1.0 | 2.5 | DRILL CHART: TOP to BOTTOM | ALL UNITS ARE IN MILLIMETERS | PLATED | QTY | 91 | 5 | 6
